# Altium PCB demo_dermis_main_testboard.PcbDoc (part 7 of 7)
Units mm, origin at the board's own origin, x right, y up, seen from the top; angles counter-clockwise.
Board outline 348.67 x 252.79 mm, 4 copper layers (Top Layer, Layer 1, Layer 2, Bottom Layer), stack 0.603 mm thick; 389 components, 231 nets, 2086 pads, 2626 vias.
Unrouted connection lines stored in the file: 34.
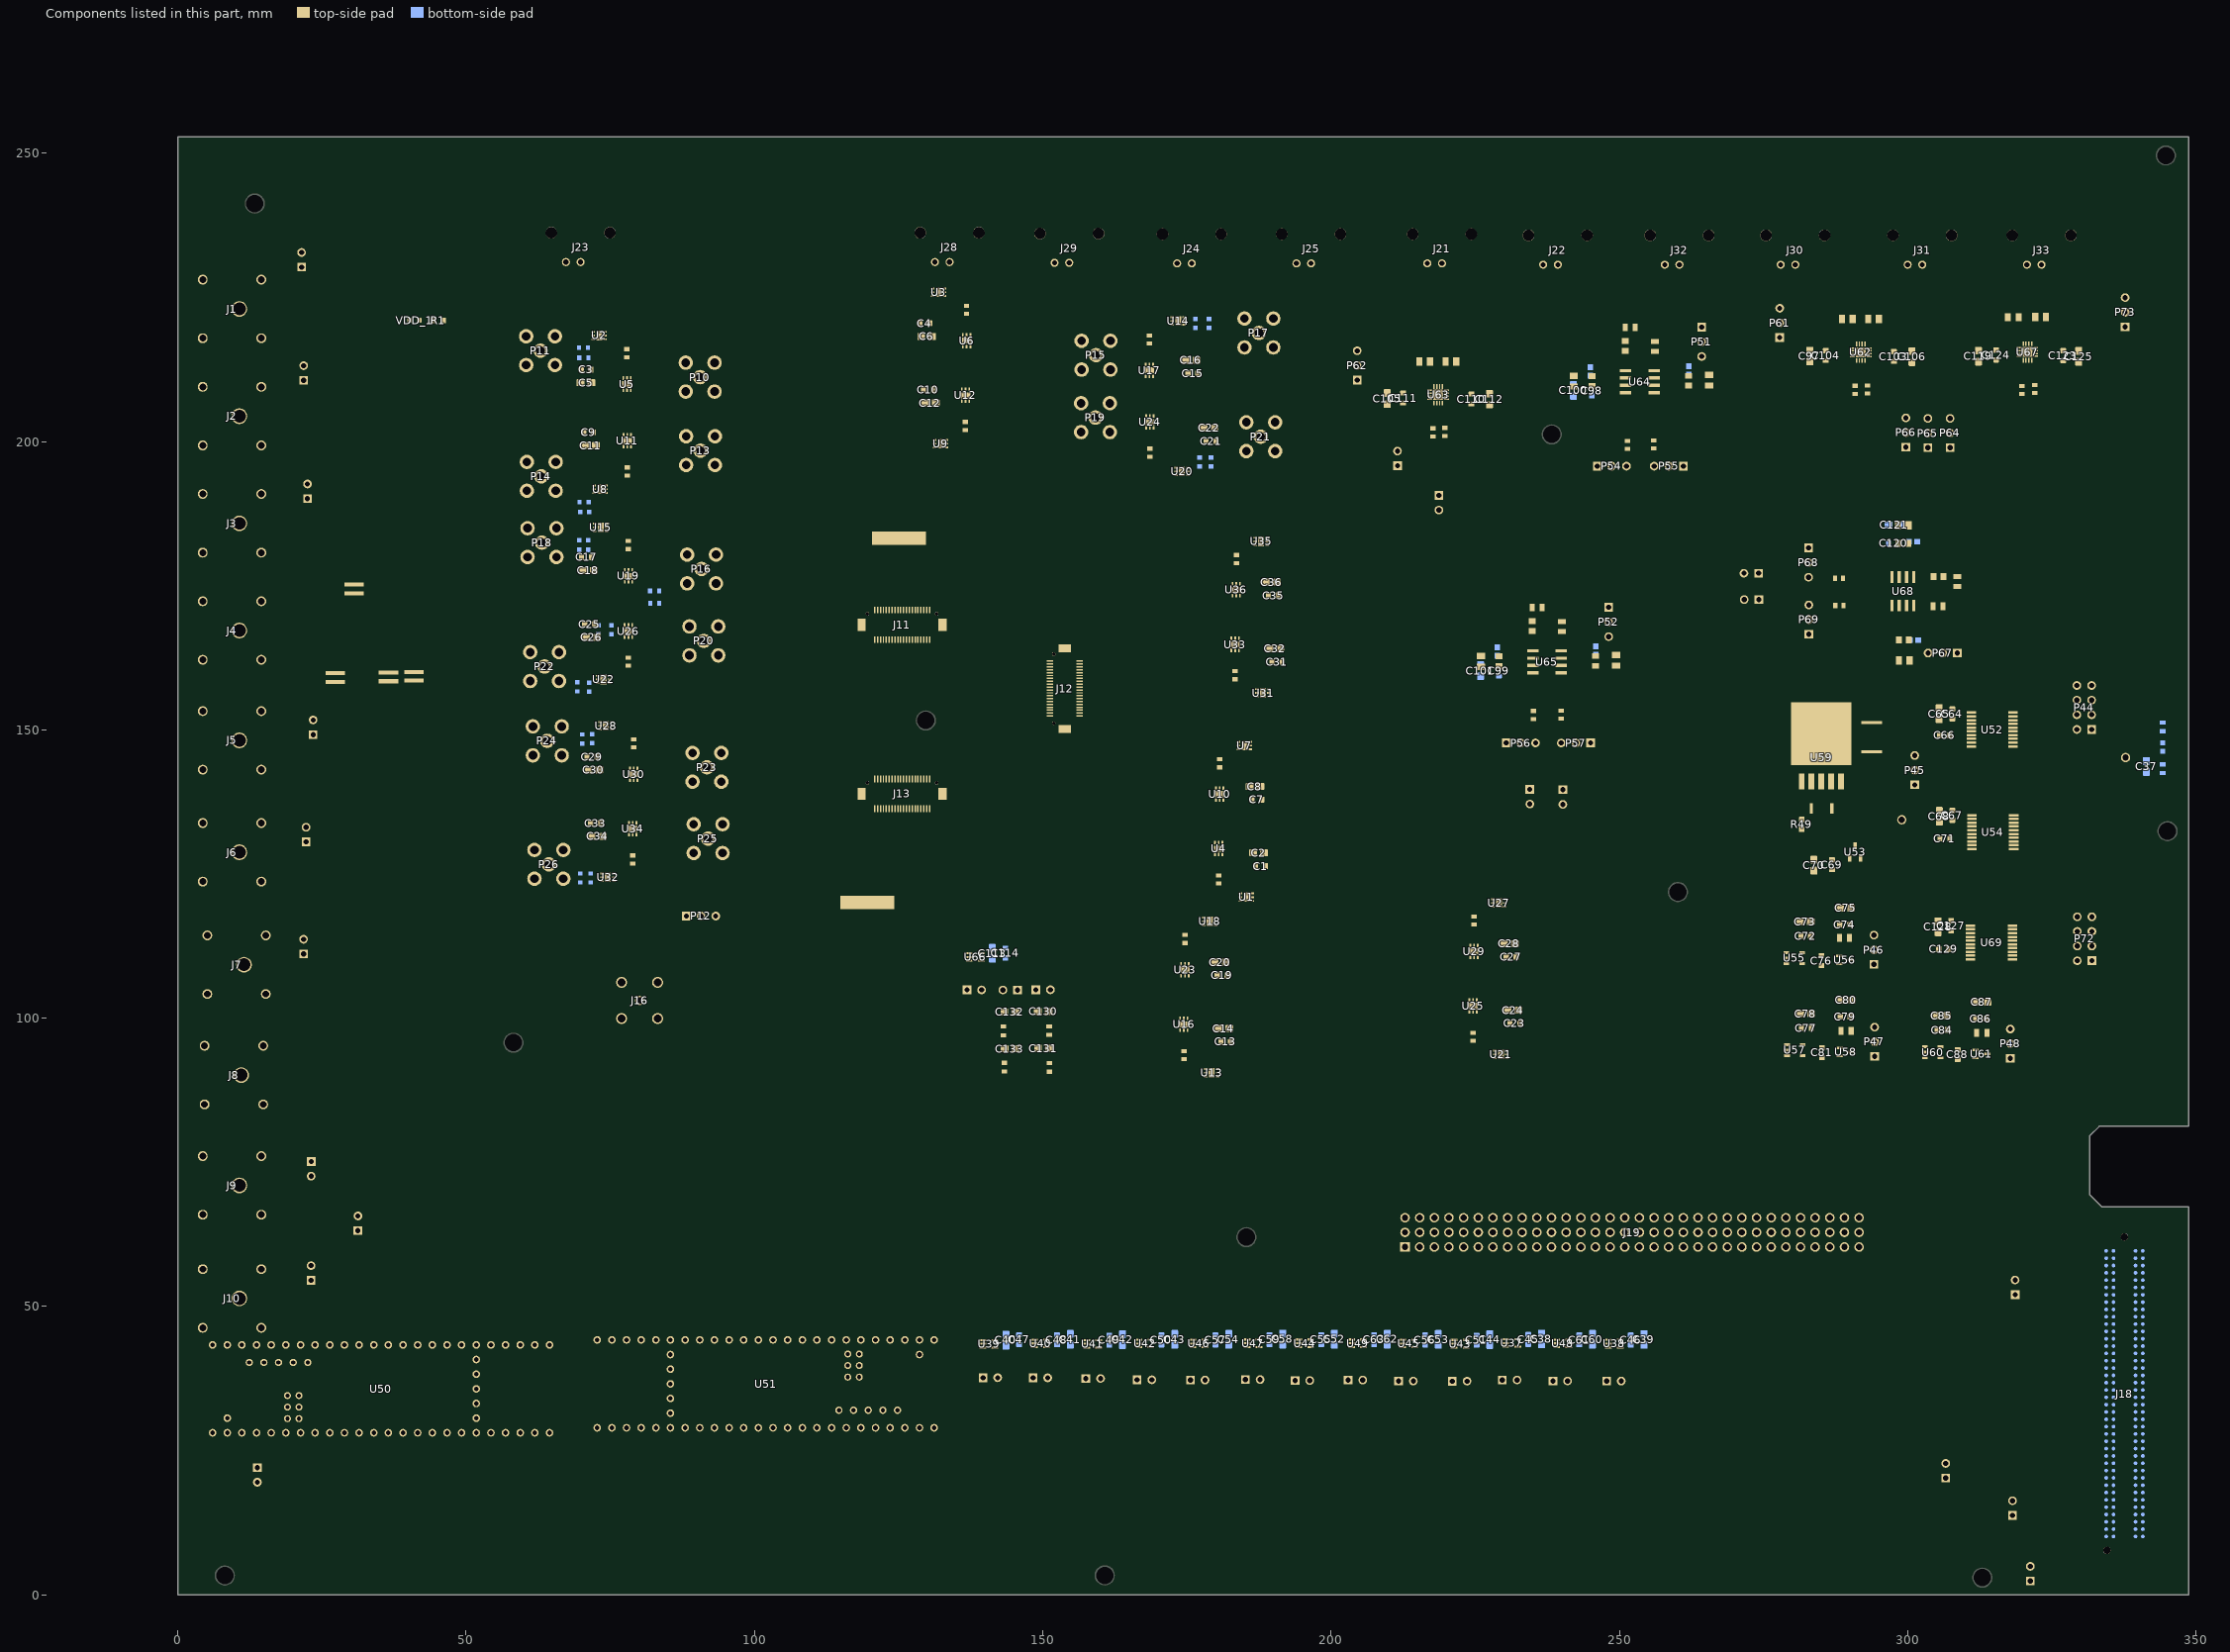
[diagram p8: the components of this part, seen from the top]

## Silkscreen, mask and mechanical layers (free items; w line width, h text height)
Top Overlay:
  drawing of 215 lines, arcs and shapes, not listed
  text "for Ted." at 1.723,249.634 h3
  text "VOUT_COMP_BUF" at 69.123,229.634 h1
  text "VOUTN_Y0_INAMP" at 210.841,228.984 h1
  text "VOUTP_OTA_INAMP" at 127.131,228.557 h1
  text "VOUTN_OTA_INAMP" at 149.144,228.531 h1
  text "VIN_OTA (SINGLE-ENDED)" at 165.761,228.531 h1
  text "VIN_Y0 (SINGLE-ENDED)" at 187.283,228.372 h1
  text "VOUTP_Y0_INAMP" at 233.135,228.155 h1
  text "VIN_X0 (SINGLE-ENDED)" at 250.955,228.118 h1
  text "VOUTP_X0_INAMP" at 296.177,228.05 h1
  text "VOUTN_X0_INAMP" at 273.083,227.624 h1
  text "VDD_5V_IN" at 23.918,224.898 h2.5
  text "VCM_INAMP" at 339.286,224.808 h1
  text "VN_Y0_1" at 139.016,224.741 h2.5
  text "VOCM_IN / (CMRR)" at 323.139,224.544 h1
  text "]ext" at 339.638,220.583 h1
  text "VCM sel" at 268.244,219.644 h1
  text "VN_X0" at 152.184,219.368 h2.5
  text "VINN_Y0_1" at 105.489,217.894 h2.5
  text "VOCM  / (IN)" at 273.921,217.007 h0.5
  text "VN_Y1" at 86.123,216.225 h2.5
  text "VOCM  / (IN)" at 266.013,213.425 h0.5
  text "VINN_X0" at 179.043,211.266 h2.5
  text "VINN_Y1" at 51.758,208.57 h2.5
  text "VCM sel" at 201.327,207.789 h1
  text "VNEG (-5V)" at 27.491,207.194 h2.5
  text "VOUT_Y0" at 267.999,206.966 h3
  text "VINP_X0" at 179.941,206.416 h2.5
  text "VINP_Y0_1" at 106.618,203.971 h2.5
  text "VIN_OTA" at 245.967,201.817 h3
  text "VINP_Y1" at 55.116,201.581 h2.5
  text "VOUT_X0" at 323.592,201.121 h3
  text "VOUTP_X0" at 311.45,198.724 h1 r45
  text "ext[" at 205.523,198.274 h1
  text "ext" at 245.155,197.441 h1
  text "ext" at 260.44,197.441 h1
  text "VOUTP_Y0" at 282.039,197.371 h1 r45
  text "VP_X0" at 152.389,197.012 h2.5
  text "VINN_OTA" at 263.193,196.48 h1
  text "VINP_OTA" at 235.62,196.231 h1
  text "VOUTN_X0" at 315.591,196.141 h1 r45
  text "VP_Y0_1" at 134.745,196.101 h2.5
  text "A0" at 298.261,195.926 h1.5
  text "A2" at 306.255,195.872 h1.5
  text "A1" at 302.378,195.792 h1.5
  text "VOUT_OTA" at 212.984,195.284 h3
  text "VOUTN_Y0" at 285.377,194.201 h1 r45
  text "VOUTN_OTA" at 200.236,194.189 h1
  text "VP_Y1" at 85.871,191.223 h2.5
  text "VOUTP_OTA" at 207.549,189.005 h1
  text "]ext" at 220.326,188.856 h1
  text "VDD_3P3V_IN" at 27.644,187.717 h2.5
  text "VINP_Y0_3" at 190.617,183.235 h2.5
  text "VN_X1" at 85.94,182.757 h2.5
  text "ext" at 284.479,181.242 h1
  text "VOUTP_X0" at 268.119,180.243 h1
  text "PCB_AGND" at 21.28,179.607 h1.5
  text "VINN_X1" at 53.176,175.861 h2.5
  text "VP_Y0_3" at 163.096,171.085 h2.5
  text "VOUTN_X0" at 268.321,168.902 h1
  text "GND" at 19.786,168.568 h2.5
  text "ext" at 284.517,166.46 h1
  text "VINP_X1" at 53.416,165.687 h2.5
  text "VIN_X0" at 271.878,159.996 h3
  text "VN_Y0_3" at 163.362,158.62 h2.5
  text "VP_X1" at 87.16,158.205 h2.5
  text "VDAC_RESERVED0" at 333.626,157.177 h0.9
  text "VINN_Y0_3" at 193.803,156.657 h2.5
  text "VTRIG_COMP" at 334.168,154.565 h0.9
  text "VSS" at 36.964,152.391 h1.5 r90
  text "VTUNE_PSEUDO" at 333.978,152.008 h0.9
  text "AGND" at 28.288,150.581 h1.5 r90
  text "VCM" at 334.13,149.604 h0.9
  text "ext" at 228.719,149.512 h1
  text "ext" at 244.004,149.512 h1
  text "VN_Y0" at 86.867,148.378 h2.5
  text "VDAC  / (extra)" at 298.847,146.954 h1
  text "PCB_DGND" at 40.252,146.44 h1.5 r90
  text "VINN_X0_2" at 187.721,146.069 h2.5
  text "VREF" at 302.698,144.702 h1
  text "VINN_Y0" at 55.27,141.841 h2.5
  text "VDD_DIG_6V" at 20.647,139.936 h2.5
  text "LDO" at 302.79,139.78 h1
  text "VOUTN_Y0" at 242.174,139.694 h1
  text "VOUTP_Y0" at 225.043,139.582 h1
  text "DIVIDER / (1.5V)" at 337.478,137.872 h0.9
  text "VN_X0_2" at 162.148,134.004 h2.5
  text "VINP_Y0" at 54.022,131.655 h2.5
  text "VIN_Y0" at 230.735,129.902 h3
  text "VP_X0_2" at 162.499,125.696 h2.5
  text "VP_Y0" at 85.99,124.168 h2.5
  text "VDD_IO_3P3V" at 20.609,121.228 h2.5
  text "VINP_X0_2" at 191.434,120.903 h2.5
  text "VINN_X0_3" at 231.821,119.043 h2.5
  text "VINP_COMP" at 333.974,117.401 h0.9
  text "VN_X0_3" at 204.866,116.83 h2.5
  text "VCM" at 79.608,116.737 h2
  text "(pre-filt)" at 335.606,116.303 h0.6
  text "VINN_COMP" at 333.853,114.756 h0.9
  text "VP_Y0_2" at 154.58,114.098 h2.5
  text "(pre-filt)" at 335.592,113.607 h0.6
  text "VINP_Y0_2" at 185.018,112.651 h2.5
  text "VDAC_RESERVED1" at 333.62,112.227 h0.9
  text "VCM_INAMP" at 333.747,109.744 h0.9
  text "IBIAS_SLEW" at 296.885,105.586 h1 r90
  text "VINN_COMP" at 141.795,102.689 h0.7
  text "VOUT_COMP" at 135.634,102.658 h0.7
  text "VINP_COMP" at 147.954,102.637 h0.7
  text "VDD_DIG_3V" at 21.267,102.063 h2.5
  text "VP_X0_3" at 204.374,97.753 h2.5
  text "VINP_X0_3" at 232.469,92.947 h2.5
  text "CLK" at 77.64,91.156 h5
  text "IBIAS_AFE" at 297.054,90.727 h1 r90
  text "VINN_Y0_2" at 185.827,90.683 h2.5
  text "IBIAS_ADAPT" at 320.353,89.552 h1 r90
  text "VN_Y0_2" at 159.884,88.083 h2.5
  text "VDD_TAXEL_3V" at 21.34,82.284 h2.5
  text "Filter  / (COMP)" at 140.116,80.886 h2.5
  text "VDD_OTA" at 35.205,64.371 h2.5
  text "D" at 338.956,64.267 h1
  text "C" at 340.663,64.267 h1
  text "H" at 333.756,64.22 h1
  text "G" at 335.257,64.204 h1
  text "GND" at 205.789,63.415 h1.5
  text "SIGNALS" at 201.14,59.504 h1.5
  text "1" at 346.146,59.229 h1
  text "RST" at 213.191,56.511 h0.9 r90
  text "ACK" at 215.806,56.48 h0.9 r90
  text "SDI" at 277.085,56.337 h0.9 r90
  text "GND" at 282.989,55.93 h1.5
  text "SCLK" at 274.492,55.261 h0.9 r90
  text "REQON" at 218.207,54.618 h0.9 r90
  text "ADDRX0" at 223.477,54.123 h0.9 r90
  text "LDACb" at 264.368,54.114 h0.9 r90
  text "VDD_COMP" at 26.494,54.05 h2.5
  text "ADDRX1" at 225.581,54.021 h0.9 r90
  text "REQOFF" at 220.822,54.012 h0.9 r90
  text "SER_IN" at 243.681,53.986 h0.9 r90
  text "RESETb" at 261.366,53.936 h0.9 r90
  text "ADDRX2" at 228.431,53.776 h0.9 r90
  text "SER_EN" at 248.841,53.699 h0.9 r90
  text "ADDRY0" at 230.998,53.586 h0.9 r90
  text "AER_DIS" at 251.243,53.259 h0.9 r90
  text "GAIN_HI" at 256.385,53.249 h0.9 r90
  text "SPKGATE" at 253.831,53.129 h0.9 r90
  text "SER_OUT" at 246.288,52.914 h0.9 r90
  text "SER_CLK" at 241.214,52.893 h0.9 r90
  text "CT_MODE" at 258.833,52.884 h0.9 r90
  text "CSb_IDAC" at 271.88,52.419 h0.9 r90
  text "DIGITAL  / TEST / (FPGA)" at 305.551,52.308 h1.5
  text "CSb_VDAC" at 267.047,52.136 h0.9 r90
  text "STATE_OUT" at 238.626,51.299 h0.9 r90
  text "RATIOMODE0" at 233.698,51.047 h0.9 r90
  text "RATIOMODE1" at 236.307,50.923 h0.9 r90
  text "CSb_VDAC_COMP" at 269.182,47.78 h0.9 r90
  text "GND" at 127.463,46.135 h1
  text "GND" at 94.097,46.109 h1
  text "GND" at 4.531,41.018 h1
  text "0" at 8.263,40.367 h1.5
  text "12V(FPGA)" at 292.103,38.624 h1.5
  text "ADDRX1" at 184.211,32.928 h0.9
  text "SER_IN" at 228.654,32.756 h0.9
  text "SER_OUT" at 237.409,32.763 h0.9
  text "RST" at 139.902,32.69 h0.9
  text "ADDRX0" at 174.271,32.63 h0.9
  text "STATE_OUT" at 209.54,32.601 h0.9
  text "ACK" at 148.151,32.573 h0.9
  text "REQON" at 157.4,32.573 h0.9
  text "SER_CLK" at 218.73,32.575 h0.9
  text "SER_EN" at 247.239,32.556 h0.9
  text "REQOFF" at 165.275,32.423 h0.9
  text "ADDRY0" at 201.601,32.104 h0.9
  text "ADDRX2" at 192.266,31.659 h0.9
  text "GND" at 40.195,29.352 h1
  text "3.3V" at 94.488,26.044 h1
  text "GND" at 130.89,25.725 h1
  text "GND" at 7.28,25.443 h1
  text "0" at 128.081,25.324 h1.5
  text "Arduino Teensy 4.1 (etc)" at 15.792,23.449 h2
  text "Arduino Teensy 4.1 (AER)" at 83.811,22.641 h2
  text "(RST) Connect ONLY during  / COMPARATOR TESTING" at 6.06,13.054 h1
  text "Zedboard FMC" at 328.37,12.188 h3 r90
  text "Pragmatic Chip (DEMO): Mar '25  PCB: June '25" at 45.514,11.937 h2 r359.52
  text "3.3V(FPGA)" at 310.038,10.305 h1.5
  text "40" at 345.956,9.851 h1
  text "DERMIS" at 169.481,9.84 h20 r359.79
  text "mark.alea@kuleuven.be" at 174.661,6.23 h3 r0.14
  text "VADJ (FPGA)" at 305.69,5.98 h1.5
  text "Sharmine" at 267.986,2.095 h2
  text "Buhay ay 'di karera..." at 15.587,1.992 h2.5
  text "Pierre | Harper | Harriet | Job | Leon / NatNat" at 279.292,1.409 h2
Bottom Overlay:
  text ">> USB / SIDE" at 132.126,50.917 h1.52
  text "<< USB / SIDE" at 9.339,47.073 h1.52

## Text inside footprints (layer, text, board x,y; h text height)
P44: Top Overlay "2" at 329.824,147.535 h1.27 r90; Top Overlay "1" at 332.364,148.043 h1.27 r90; Top Overlay "7" at 332.364,159.219 h1.27 r90; Top Overlay "8" at 329.824,159.219 h1.27 r90
P72: Top Overlay "8" at 329.875,119.11 h1.27 r90; Top Overlay "7" at 332.415,119.11 h1.27 r90; Top Overlay "1" at 332.415,107.934 h1.27 r90; Top Overlay "2" at 329.875,107.426 h1.27 r90
U37: Top Overlay "*" at 229.699,44.541 h1.27; Mechanical 13 "*" at 229.699,44.541 h1.27
U38: Top Overlay "*" at 247.476,44.45 h1.27; Mechanical 13 "*" at 247.476,44.45 h1.27
U39: Top Overlay "*" at 139.018,44.41 h1.27; Mechanical 13 "*" at 139.018,44.41 h1.27
U40: Top Overlay "*" at 147.974,44.477 h1.27; Mechanical 13 "*" at 147.974,44.477 h1.27
U41: Top Overlay "*" at 157.027,44.423 h1.27; Mechanical 13 "*" at 157.027,44.423 h1.27
U42: Top Overlay "*" at 166.087,44.472 h1.27; Mechanical 13 "*" at 166.087,44.472 h1.27
U43: Top Overlay "*" at 220.736,44.432 h1.27; Mechanical 13 "*" at 220.736,44.432 h1.27
U44: Top Overlay "*" at 193.79,44.512 h1.27; Mechanical 13 "*" at 193.79,44.512 h1.27
U45: Top Overlay "*" at 211.807,44.461 h1.27; Mechanical 13 "*" at 211.807,44.461 h1.27
U46: Top Overlay "*" at 175.456,44.472 h1.27; Mechanical 13 "*" at 175.456,44.472 h1.27
U47: Top Overlay "*" at 184.829,44.517 h1.27; Mechanical 13 "*" at 184.829,44.517 h1.27
U48: Top Overlay "*" at 238.547,44.48 h1.27; Mechanical 13 "*" at 238.547,44.48 h1.27
U49: Top Overlay "*" at 202.959,44.522 h1.27; Mechanical 13 "*" at 202.959,44.522 h1.27
U50: Mechanical 13 "Teensy 4.1" at 34.99,35.389 h1.27 r180
U51: Mechanical 13 "Teensy 4.1" at 102.188,36.934 h1.27
U52: Top Overlay "*" at 310.417,153.29 h1.27; Mechanical 13 "*" at 311.89,152.461 h1.27
U54: Top Overlay "*" at 310.523,135.505 h1.27; Mechanical 13 "*" at 311.996,134.676 h1.27
U55: Top Overlay "*" at 278.371,111.761 h1.27; Mechanical 13 "*" at 279.365,110.796 h1.27
U57: Top Overlay "*" at 278.472,95.81 h1.27; Mechanical 13 "*" at 279.466,94.844 h1.27
U59: Top Overlay "*" at 279.775,140.422 h1.27; Mechanical 13 "*" at 281.261,143.877 h1.27
U60: Top Overlay "*" at 302.369,95.401 h1.27; Mechanical 13 "*" at 303.363,94.435 h1.27
U62: Top Overlay "*" at 291.468,212.668 h1.27 r90; Mechanical 13 "*" at 291.468,214.116 h1.27 r90
U63: Top Overlay "*" at 218.192,205.297 h1.27 r90; Mechanical 13 "*" at 218.192,206.744 h1.27 r90
U64: Top Overlay "*" at 250.497,212.723 h1.27; Mechanical 13 "*" at 250.497,212.723 h1.27
U65: Top Overlay "*" at 234.38,164.139 h1.27; Mechanical 13 "*" at 234.38,164.139 h1.27
U66: Top Overlay "*" at 136.664,111.496 h1.27; Mechanical 13 "*" at 136.664,111.496 h1.27
U67: Top Overlay "*" at 320.387,212.724 h1.27 r90; Mechanical 13 "*" at 320.387,214.172 h1.27 r90
U68: Top Overlay "*" at 301.475,177.062 h1.27 r270; Mechanical 13 "*" at 301.475,177.062 h1.27 r270
U69: Top Overlay "*" at 310.307,116.351 h1.27; Mechanical 13 "*" at 311.781,115.523 h1.27